# EAGLE board ESP32-P4 Display 5.0 inch V1.0 (EAGLE 9.6.2), part 1 of 3
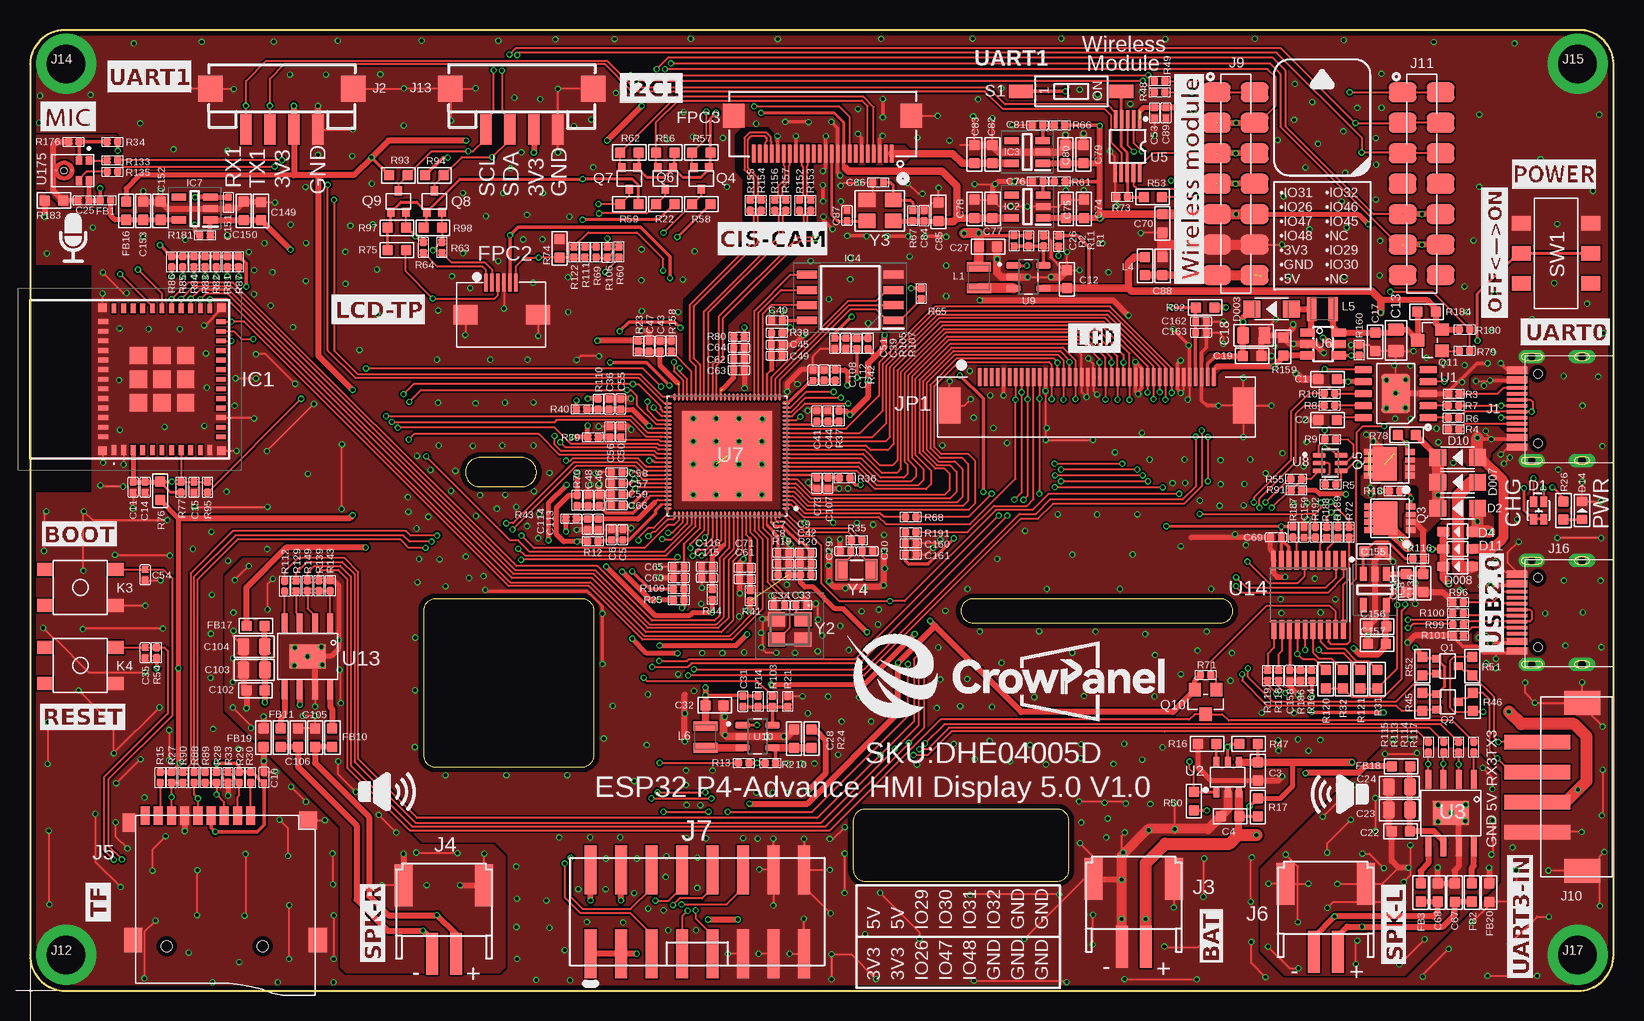
[diagram p0: board, top side]
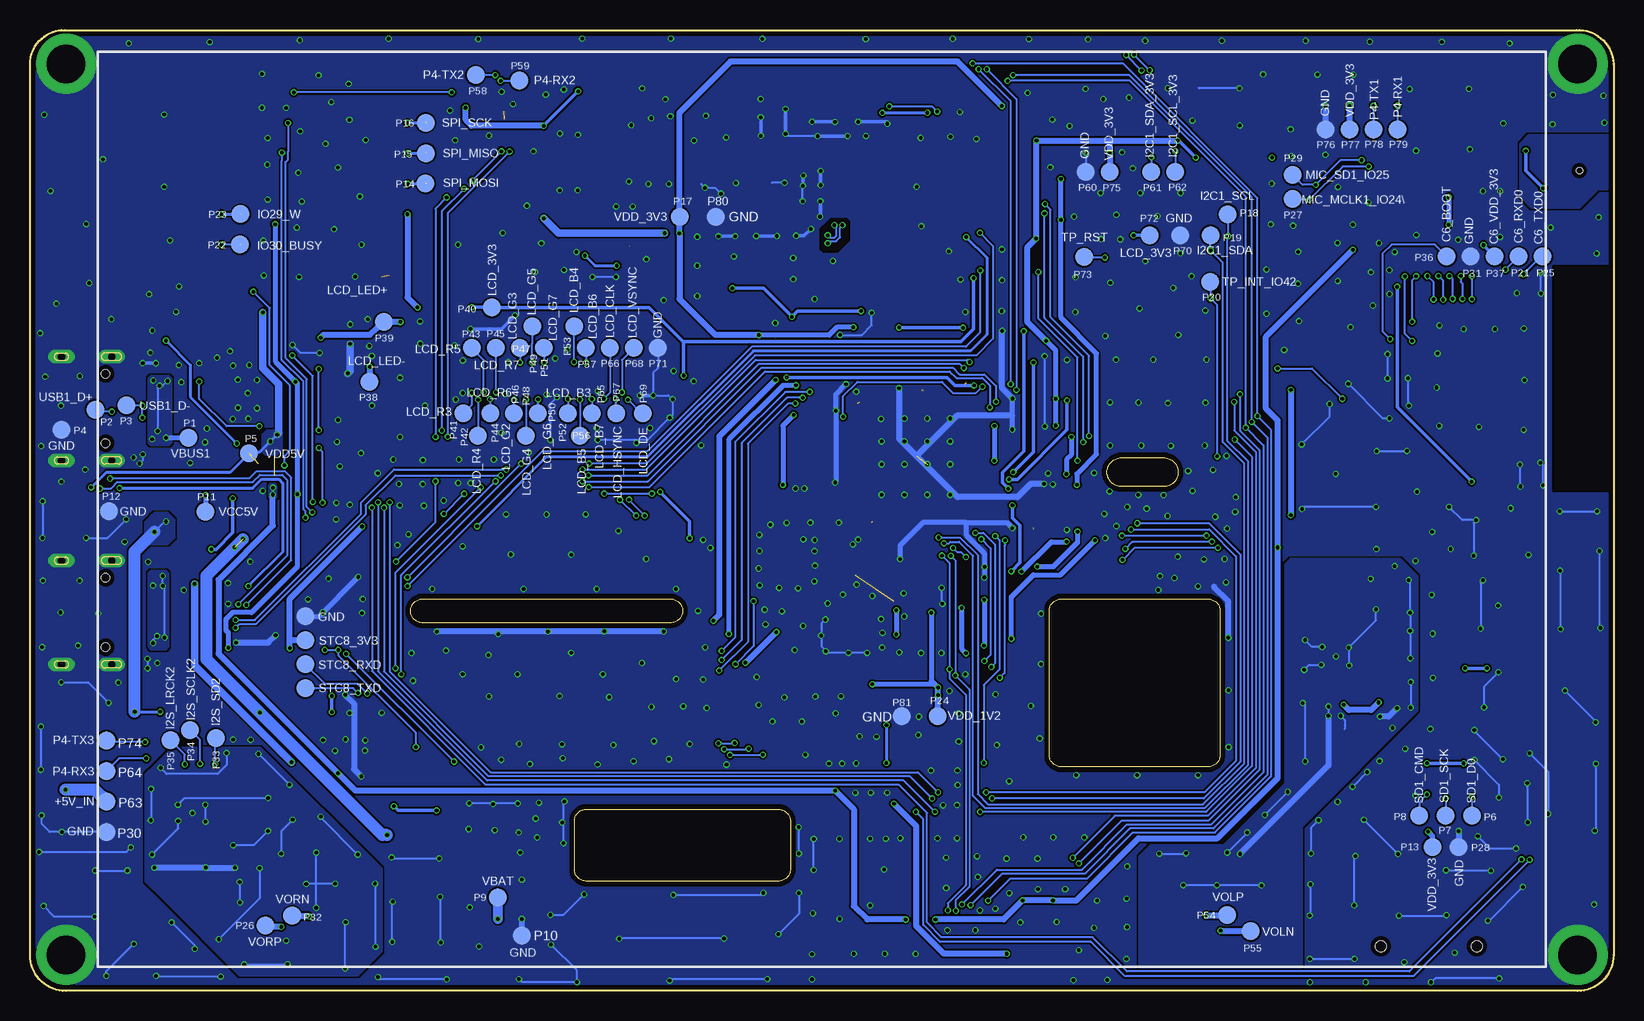
[diagram p1: board, bottom side, seen from below]

Size 132 x 80.12 mm. Coordinates in mm from the lower left corner, seen from the top.
Outline: 129.09,80.12 3.09,80.12 arc90 0,77.3 0,3 arc90 3,0 129,0 arc90 132,3 132,77.3 arc90 129.09,80.12
Outline: 78.61,30.69 99.27,30.69 arc180 99.27,32.69 78.61,32.69 arc180 78.61,30.69
Outline: 32.8,31.68 32.8,19.68 arc90 33.8,18.68 46.03,18.68 arc90 47.03,19.68 47.03,31.68 arc90 46.03,32.68 33.8,32.68 arc90 32.8,31.68
Outline: 69.61,9.14 85.61,9.14 arc90 86.61,10.14 86.61,14.14 arc90 85.61,15.14 69.61,15.14 arc90 68.61,14.14 68.61,10.14 arc90 69.61,9.14
Outline: 37.5,42.05 41.02,42.05 arc180 41.02,44.46 37.5,44.46 arc180 37.5,42.05
Copper layers (1*16): Top 0.035mm / dielectric 1.5mm / Bottom 0.035mm
Design rules "default *": minimum track width 6mil, minimum drill 0.3mm, track to track 6mil, track to pad 6mil, pad to pad 6mil, via to via 6mil, smd to smd 6mil, copper to edge 15mil, drill to drill 6mil, minimum pad ring 10mil, minimum via ring 4mil, stop-mask expansion 4mil, vias tented up to drill 100mil, thermal gap 0mil

## Footprints (pad centres in the part's own frame; a part is rotated, then mirrored left to right if it is on the bottom)
0603 = smd 0.889 x 0.889: 1 -0.762,0; 2 0.762,0
C0402 = smd 0.6 x 0.6: 1 -0.45,0; 2 0.45,0
CROWPANEL_ADVANCE_HMI_C0402 = smd 0.6 x 0.6: 1 -0.45,0; 2 0.45,0
C0805 = smd 1.016 x 1.397: 1 -0.889,0; 2 0.889,0
RC_C0805 = smd 1.016 x 1.397: 1 -0.889,0; 2 0.889,0
COOPER_0603 = smd 0.889 x 0.889: 1 -0.762,0; 2 0.762,0
LED_KT-0603RYG = smd 0.85 x 0.6: 1 0.725,-0.425; 2 0.725,0.425; 3 -0.725,-0.425; 4 -0.725,0.425
D_SOD123FL = smd 1.397 x 1.397: + -1.651,0; - 1.651,0
D_SOD323 = smd 1 x 0.8: + -1.2,0; - 1.2,0
LED0603 = smd 0.762 x 0.889: + -0.762,0; - 0.762,0
L0402 = smd 0.635 x 0.635: 1 -0.445,0; 2 0.445,0
L0603 = smd 0.889 x 0.889: 1 -0.762,0; 2 0.762,0
FPC-6PIN-0.5MM = smd 0.3 x 1.5: 1 -1.31,2.184; 2 -0.81,2.184; 3 -0.31,2.184; 4 0.19,2.184; 5 0.69,2.184; 6 1.19,2.184 | smd 2 x 1.6: 7 -3.01,-0.496; 8 3.036,-0.496
FPC-SMD_P0.50-24P_QCHF-SM-H2.0 = smd 0.3 x 1.5: 1 5.75,-1.574; 2 5.25,-1.574; 3 4.75,-1.574; 4 4.25,-1.574; 5 3.75,-1.574; 6 3.25,-1.574; 7 2.75,-1.574; 8 2.25,-1.574; 9 1.75,-1.574; 10 1.25,-1.574; 11 0.75,-1.574; 12 0.25,-1.574; 13 -0.25,-1.574; 14 -0.75,-1.574; 15 -1.25,-1.574; 16 -1.75,-1.574; 17 -2.25,-1.574; 18 -2.75,-1.574; 19 -3.25,-1.574; 20 -3.75,-1.574; 21 -4.25,-1.574; 22 -4.75,-1.574; 23 -5.25,-1.574; 24 -5.75,-1.574 | smd 1.8 x 2: 25 7.4,1.576; 26 -7.4,1.576
ESP32C6MINI1N4 = smd 0.8 x 0.4: 1 -5.9,4; 2 -5.9,3.2; 3 -5.9,2.4; 4 -5.9,1.6; 5 -5.9,0.8; 6 -5.9,0; 7 -5.9,-0.8; 8 -5.9,-1.6; 9 -5.9,-2.4; 10 -5.9,-3.2; 11 -5.9,-4; 25 5.9,-4; 26 5.9,-3.2; 27 5.9,-2.4; 28 5.9,-1.6; 29 5.9,-0.8; 30 5.9,0; 31 5.9,0.8; 32 5.9,1.6; 33 5.9,2.4; 34 5.9,3.2; 35 5.9,4 | smd 0.4 x 0.8: 12 -4.8,-4.9; 13 -4,-4.9; 14 -3.2,-4.9; 15 -2.4,-4.9; 16 -1.6,-4.9; 17 -0.8,-4.9; 18 0,-4.9; 19 0.8,-4.9; 20 1.6,-4.9; 21 2.4,-4.9; 22 3.2,-4.9; 23 4,-4.9; 24 4.8,-4.9; 36 4.8,4.9; 37 4,4.9; 38 3.2,4.9; 39 2.4,4.9; 40 1.6,4.9; 41 0.8,4.9; 42 0,4.9; 43 -0.8,4.9; 44 -1.6,4.9; 45 -2.4,4.9; 46 -3.2,4.9; 47 -4,4.9; 48 -4.8,4.9 | smd 1.45 x 1.45: 49 0,0; 54 -1.975,1.975; 55 -1.975,0; 56 -1.975,-1.975; 57 0,-1.975; 58 1.975,-1.975; 59 1.975,0; 60 1.975,1.975; 61 0,1.975 | smd 0.7 x 0.7: 50 5.95,4.95; 51 5.95,-4.95; 52 -5.95,-4.95; 53 -5.95,4.95
SOT95P282X145-5N = smd 1.2 x 0.6: 1 -1.3,0.95; 2 -1.3,0; 3 -1.3,-0.95; 4 1.3,-0.95; 5 1.3,0.95
SOIC127P790X216-8N = smd 1.65 x 0.65: 1 -3.6,1.905; 2 -3.6,0.635; 3 -3.6,-0.635; 4 -3.6,-1.905; 5 3.6,-1.905; 6 3.6,-0.635; 7 3.6,0.635; 8 3.6,1.905
USB-3.0TYPEC-SMD = smd 0.3 x 1.7: A1 -3.35,0.5; A4 -2.55,0.5; A5 -1.25,0.5; A6 -0.25,0.5; A7 0.25,0.5; A8 1.25,0.5; A9 2.55,0.5; A12 3.35,0.5; B1 3.05,0.5; B4 2.25,0.5; B5 1.75,0.5; B6 0.75,0.5; B7 -0.75,0.5; B8 -1.75,0.5; B9 -2.25,0.5; B12 -3.05,0.5 | drill 0.6 pad 1.016 long: P$1 -4.325,-0.72; P$2 4.325,-0.72; P$3 -4.325,-4.9; P$4 4.325,-4.9 | hole 0.68: -2.89,-1.22; 2.89,-1.22
CONNECTOR_4P-SMD-2.0 = smd 0.965 x 2.54: 1 -3,0; 2 -1,0; 3 1,0; 4 3,0 | smd 2.032 x 2.184: SS1 -5.946,3.4; SS2 5.946,3.4
PH2.0WT-2PIN = smd 1 x 3.5: P$1 -1,0; P$2 1,0 | smd 1.5 x 3.5: P$3 -3.35,-5.7; P$4 3.35,-5.7
9P-SMD-W/-RING = smd 1.524 x 0.762: 1 0,4.4; 2 0,3.3; 3 0,2.2; 4 0,1.1; 5 0,0; 6 0,-1.1; 7 0,-2.2; 8 0,-3.3; 9 0,-4.4 | smd 1.524 x 1.016: G1 0.6,-5.746 | smd 2.032 x 1.524: G2 10.373,-5.4; G3 10.373,10 | smd 1.524 x 1.524: G4 0.392,9.181 | hole 0.889: 10.9,-2.6; 10.9,5.4
2X8_SMD = smd 4.1 x 1.02: 1 -3.5,8.89; 2 3.5,8.89; 3 -3.5,6.35; 4 3.5,6.35; 5 -3.5,3.81; 6 3.5,3.81; 7 -3.5,1.27; 8 3.5,1.27; 9 -3.5,-1.27; 10 3.5,-1.27; 11 -3.5,-3.81; 12 3.5,-3.81; 13 -3.5,-6.35; 14 3.5,-6.35; 15 -3.5,-8.89; 16 3.5,-8.89
TEST-PIN-4-2.0MM = smd 1.5 x 1.5: 1 -3,0; 2 -1,0; 3 1,0; 4 3,0
H7-2.54-18.28X2.5X5MM = smd 1.65 x 2.3: 1 -7.62,-1.58; 1-1 -7.62,1.58; 2 -5.08,-1.58; 2-2 -5.08,1.58; 3 -2.54,-1.58; 3-3 -2.54,1.58; 4 0,-1.58; 4-4 0,1.58; 5 2.54,-1.58; 5-5 2.54,1.58; 6 5.08,-1.58; 6-6 5.08,1.58; 7 7.62,-1.58; 7-7 7.62,1.58
XH2.54-4P-SMD = smd 1.2 x 5.5: 1 -3.75,-1.875; 2 -1.25,-1.875; 3 1.25,-1.875; 4 3.75,-1.875 | smd 2 x 3: 5 -7,1.875; 6 7,1.875
CROWPANEL_ADVANCE_HMI_THO-M3.2*5MM-HOLE = drill 3.2 pad 5: P$1 0,0
CROWPANEL_ADVICE_HMI-4.3_COOPER_0.5MM*40P = smd 0.3 x 1.5: P$1 -8.81,1.73; P$2 -8.31,1.73; P$3 -7.81,1.73; P$4 -7.31,1.73; P$5 -6.81,1.73; P$6 -6.31,1.73; P$7 -5.81,1.73; P$8 -5.31,1.73; P$9 -4.81,1.73; P$10 -4.31,1.73; P$11 -3.81,1.73; P$12 -3.31,1.73; P$13 -2.81,1.73; P$14 -2.31,1.73; P$15 -1.81,1.73; P$16 -1.31,1.73; P$17 -0.81,1.73; P$18 -0.31,1.73; P$19 0.19,1.73; P$20 0.69,1.73; P$21 1.19,1.73; P$22 1.69,1.73; P$23 2.19,1.73; P$24 2.69,1.73; P$25 3.19,1.73; P$26 3.69,1.73; P$27 4.19,1.73; P$28 4.69,1.73; P$29 5.19,1.73; P$30 5.69,1.73; P$31 6.19,1.73; P$32 6.69,1.73; P$33 7.19,1.73; P$34 7.69,1.73; P$35 8.19,1.73; P$36 8.69,1.73; P$37 9.19,1.73; P$38 9.69,1.73; P$39 10.19,1.73; P$40 10.69,1.73 | smd 1.8 x 3: P$41 -11.31,-0.67; P$42 13.19,-0.67
KEY-4.5X4.5-SMD = smd 1.35 x 1.1: 1 -2.925,1.5; 2 -2.925,-1.5; 3 2.925,-1.5; 4 2.925,1.5
1008(2520) = smd 0.8 x 2: 1 -0.9,0; 2 0.9,0
TEST_PAD-1.5MM = smd 1.5 x 1.5: P$1 0,0
MOS_SOT323 = smd 0.635 x 0.762: 1 -0.635,-0.889; 2 0.635,-0.889; 3 0,0.889
MY_LIB_PDFN3333 = smd 0.5 x 0.8: 1 -0.975,-1.725; 2 -0.325,-1.725; 4 0.975,-1.725; 5 0.975,1.725; 6 0.325,1.725; 7 -0.325,1.725; 8 -0.975,1.725 | smd 0.4 x 0.8: 3 0.325,-1.725 | smd 2.8 x 2: 9 0,0.4
PMOS_SOT23 = smd 1.016 x 1.143: 1 -0.889,-1.016; 2 0.889,-1.016; 3 0,1.016
CROWPANEL_ADVANCE_HMI_R0402 = smd 0.635 x 0.635: 1 -0.445,0; 2 0.445,0
R0402 = smd 0.635 x 0.635: 1 -0.445,0; 2 0.445,0
R0603-SP = smd 0.889 x 0.889: 1 -0.762,0; 2 0.762,0
R0603 = smd 0.889 x 0.889: 1 -0.762,0; 2 0.762,0
COOPER_R0603 = smd 0.889 x 0.889: 1 -0.762,0; 2 0.762,0
SW_SMD2_DSIC-01-TS-GER = smd 1.1 x 2: 1 0,-4.2; 2 0,4.2
SWITCH_6PIN_2P = smd 1.2 x 1.6: 1 2.5,-2.9; 2 0,-2.9; 3 -2.5,-2.9; 4 -2.5,2.9; 5 0,2.9; 6 2.5,2.9
ESOP-10-EP-150MIL = smd 1.5 x 0.6: 1 -2.7,2; 2 -2.7,1; 3 -2.7,0; 4 -2.7,-1; 5 -2.7,-2; 6 2.7,-2; 7 2.7,-1; 8 2.7,0; 9 2.7,1; 10 2.7,2 | smd 2.4 x 3.2: EP 0,0
SOT23-6L = smd 0.5 x 0.9: 1 -0.961,-1.212; 2 -0.011,-1.212; 3 0.94,-1.212; 4 0.94,1.288; 5 -0.011,1.288; 6 -0.961,1.288
NS4168-ESOP-8 = smd 1.6 x 0.5: 1 -2.8,1.905; 2 -2.8,0.635; 3 -2.8,-0.635; 4 -2.8,-1.905; 5 2.8,-1.905; 6 2.8,-0.635; 7 2.8,0.635; 8 2.8,1.905 | smd 2 x 3: 9 0,0
MSOP-10 = smd 1.5 x 0.3: 1 -2.25,1; 2 -2.25,0.5; 3 -2.25,0; 4 -2.25,-0.5; 5 -2.25,-1; 6 2.25,-1.032; 7 2.25,-0.524; 8 2.25,-0.016; 9 2.25,0.492; 10 2.25,1
COOPER_SOT23-6 = smd 0.69 x 1.2: 1 -0.95,-1.3; 2 0,-1.3; 3 0.95,-1.3; 4 0.95,1.3; 5 0,1.3; 6 -0.95,1.3
IC_ESP32-P4NRW32 = smd 0.65 x 0.18: 1 -4.925,4.375; 2 -4.925,4.025; 3 -4.925,3.675; 4 -4.925,3.325; 5 -4.925,2.975; 6 -4.925,2.625; 7 -4.925,2.275; 8 -4.925,1.925; 9 -4.925,1.575; 10 -4.925,1.225; 11 -4.925,0.875; 12 -4.925,0.525; 13 -4.925,0.175; 14 -4.925,-0.175; 15 -4.925,-0.525; 16 -4.925,-0.875; 17 -4.925,-1.225; 18 -4.925,-1.575; 19 -4.925,-1.925; 20 -4.925,-2.275; 21 -4.925,-2.625; 22 -4.925,-2.975; 23 -4.925,-3.325; 24 -4.925,-3.675; 25 -4.925,-4.025; 26 -4.925,-4.375; 53 4.925,-4.375; 54 4.925,-4.025; 55 4.925,-3.675; 56 4.925,-3.325; 57 4.925,-2.975; 58 4.925,-2.625; 59 4.925,-2.275; 60 4.925,-1.925; 61 4.925,-1.575; 62 4.925,-1.225; 63 4.925,-0.875; 64 4.925,-0.525; 65 4.925,-0.175; 66 4.925,0.175; 67 4.925,0.525; 68 4.925,0.875; 69 4.925,1.225; 70 4.925,1.575; 71 4.925,1.925; 72 4.925,2.275; 73 4.925,2.625; 74 4.925,2.975; 75 4.925,3.325; 76 4.925,3.675; 77 4.925,4.025; 78 4.925,4.375 | smd 0.18 x 0.65: 27 -4.375,-4.925; 28 -4.025,-4.925; 29 -3.675,-4.925; 30 -3.325,-4.925; 31 -2.975,-4.925; 32 -2.625,-4.925; 33 -2.275,-4.925; 34 -1.925,-4.925; 35 -1.575,-4.925; 36 -1.225,-4.925; 37 -0.875,-4.925; 38 -0.525,-4.925; 39 -0.175,-4.925; 40 0.175,-4.925; 41 0.525,-4.925; 42 0.875,-4.925; 43 1.225,-4.925; 44 1.575,-4.925; 45 1.925,-4.925; 46 2.275,-4.925; 47 2.625,-4.925; 48 2.975,-4.925; 49 3.325,-4.925; 50 3.675,-4.925; 51 4.025,-4.925; 52 4.375,-4.925; 79 4.375,4.925; 80 4.025,4.925; 81 3.675,4.925; 82 3.325,4.925; 83 2.975,4.925; 84 2.625,4.925; 85 2.275,4.925; 86 1.925,4.925; 87 1.575,4.925; 88 1.225,4.925; 89 0.875,4.925; 90 0.525,4.925; 91 0.175,4.925; 92 -0.175,4.925; 93 -0.525,4.925; 94 -0.875,4.925; 95 -1.225,4.925; 96 -1.575,4.925; 97 -1.925,4.925; 98 -2.275,4.925; 99 -2.625,4.925; 100 -2.975,4.925; 101 -3.325,4.925; 102 -3.675,4.925; 103 -4.025,4.925; 104 -4.375,4.925 | smd 7.5 x 7.5: 105 0,0
SOP65P210X100-6N = smd 1.09 x 0.4: 1 -0.92,0.65; 2 -0.92,0; 3 -0.92,-0.65; 4 0.92,-0.65; 5 0.92,0; 6 0.92,0.65
SOT95P280X145-5N = smd 1.21 x 0.59: 1 -1.255,0.95; 2 -1.255,0; 3 -1.255,-0.95; 4 1.255,-0.95; 5 1.255,0.95
TSSOP20 = smd 1.572 x 0.41: 1 -2.872,2.275; 2 -2.872,1.625; 3 -2.872,0.975; 4 -2.872,0.325; 5 -2.872,-0.325; 6 -2.872,-0.975; 7 -2.872,-1.625; 8 -2.872,-2.275; 9 -2.872,-2.895; 10 -2.872,-3.545; 11 2.872,-3.515; 12 2.872,-2.865; 13 2.872,-2.215; 14 2.872,-1.565; 15 2.872,-0.915; 16 2.872,-0.265; 17 2.872,0.355; 18 2.872,1.005; 19 2.872,1.625; 20 2.872,2.275
MMICT5838-00-012_MIC-SMD_5P-L3.5-W2.7-P1.67 = smd 0.725 x 0.522: 1 -0.838,1.362; 2 -0.838,0.542; 3 0.838,0.542; 4 0.838,1.362 | smd 0.25 x 0.25: 5_1 0,-0.048; 5_2 0,-1.373 | hole 0.5: 0,-0.71
X322540MPB4SI = smd 1.4 x 1.2: 1 -1.1,-0.85; 2 1.1,-0.85; 3 1.1,0.85; 4 -1.1,0.85
24MHZ_1631-24003-BTKEYA = smd 1.4 x 1.2: 1 -1.1,-0.875; 2 1.1,-0.875; 3 1.1,0.875; 4 -1.1,0.875
NORDIC_NRF_XTAL_3215_N = smd 1 x 1.8: 1 -1.25,0; 2 1.25,0

## Placement (x,y rotation side)
C1  1uF  [0603]  108.17,51 0 top
C2  1uF  [0603]  108.17,47.6 0 top
C3  1uF  [0603]  102.36,18.31 90 top
C4  10uF  [0603]  100.03,14.56 0 top
C5  100nF  [C0402]  49.41,38.04 90 top
C6  10uF  [C0402]  48.46,38.04 270 top
C7  100nF  [C0402]  62.8,36.52 0 top
C8  10uF  [C0402]  62.8,35.6 180 top
C9  100nF  [C0402]  64.66,36.52 180 top
C10  1uF  [CROWPANEL_ADVANCE_HMI_C0402]  19.5,17.8 270 top
C11  100nF  [CROWPANEL_ADVANCE_HMI_C0402]  8.6,42 270 top
C12  10uF  [0603]  86.44,59.34 90 top
C13  22uF  [C0805]  113.87,54.25 270 top
C14  10uF  [CROWPANEL_ADVANCE_HMI_C0402]  9.6,42 90 top
C15  100nF  [CROWPANEL_ADVANCE_HMI_C0402]  13.68,42 270 top
C17  1uF  [0603]  112.13,54.13 90 top
C18  22uF  [C0805]  102.01,54.66 0 top
C19  100nF  [0603]  101.88,52.95 0 top
C22  1uF  [0603]  114.27,13.31 180 top
C23  47uF  [RC_C0805]  114.15,15.09 180 top
C24  47uF  [RC_C0805]  114.15,17.01 180 top
C25  100nF  [C0402]  4.46,65.9 0 top
C26  22pF  [CROWPANEL_ADVANCE_HMI_C0402]  82.04,62.54 90 top
C27  10uF  [COOPER_0603]  79.86,62.05 180 top
C28  10uF  [0603]  63.68,21.02 90 top
C29  12pF  [C0402]  67.98,36.66 180 top
C30  12pF  [C0402]  69.81,36.67 0 top
C31  22pF  [CROWPANEL_ADVANCE_HMI_C0402]  59.43,24.14 90 top
C32  10uF  [COOPER_0603]  57.07,23.82 180 top
C33  15pF  [C0402]  64.29,32.16 0 top
C34  15pF  [C0402]  62.45,32.16 0 top
C35  100nF  [CROWPANEL_ADVANCE_HMI_C0402]  9.6,28.19 90 top
C36  100nF  [C0402]  48.29,48.93 90 top
C39  100nF  [C0402]  68.01,53.98 270 top
C40  100nF  [C0402]  62.27,55.9 180 top
C41  100nF  [C0402]  65.59,47.93 90 top
C42  10uF  [C0402]  64.66,35.6 0 top
C43  100nF  [C0402]  52.53,53.77 90 top
C44  10uF  [C0402]  66.51,47.93 270 top
C45  100nF  [C0402]  62.25,53.88 0 top
C46  100nF  [C0402]  47.47,40.9 90 top
C47  10uF  [C0402]  51.62,53.77 270 top
C48  10uF  [C0402]  46.54,40.9 270 top
C49  10uF  [C0402]  62.25,52.96 180 top
C50  100nF  [C0402]  49.26,46.62 90 top
C51  1uF  [C0402]  67.07,53.98 270 top
C53  100nF  [C0402]  93.74,73.2 90 top
C54  100nF  [CROWPANEL_ADVANCE_HMI_C0402]  9.6,34.69 90 top
C55  1uF  [C0402]  49.24,48.93 90 top
C56  10uF  [C0402]  48.32,46.61 270 top
C57  1uF  [C0402]  48.9,42.32 180 top
C58  1uF  [C0402]  48.9,43.25 180 top
C59  1uF  [C0402]  48.9,41.4 180 top
C60  100nF  [C0402]  54.08,34.43 180 top
C61  100nF  [C0402]  59.58,34.34 180 top
C62  10nF  [C0402]  59.1,52.69 0 top
C63  100nF  [C0402]  59.1,51.76 0 top
C64  1uF  [C0402]  59.1,53.62 0 top
C65  1uF  [C0402]  54.08,35.36 180 top
C66  1uF  [C0402]  48.9,40.48 180 top
C67  1nF  [0603]  118.76,8.21 270 top
C68  1nF  [0603]  117.34,8.21 270 top
C69  1uF  [CROWPANEL_ADVANCE_HMI_C0402]  103.86,37.81 0 top
C70  10uF  [0603]  94.41,63.98 270 top
C71  10uF  [C0402]  59.58,35.27 0 top
C73  100nF  [C0402]  65.59,42.34 270 top
C74  10uF  [0603]  87.85,65.2 270 top
C75  100nF  [0603]  86.35,65.21 270 top
C76  100nF  [CROWPANEL_ADVANCE_HMI_C0402]  84,67.48 0 top
C77  100nF  [0603]  80.25,65.21 270 top
C78  10uF  [0603]  78.75,65.21 270 top
C79  10uF  [0603]  87.82,69.76 270 top
C80  100nF  [0603]  86.32,69.76 270 top
C81  100nF  [CROWPANEL_ADVANCE_HMI_C0402]  83.98,72.17 0 top
C82  100nF  [0603]  80.22,69.76 270 top
C83  10uF  [0603]  78.72,69.76 270 top
C84  100nF  [CROWPANEL_ADVANCE_HMI_C0402]  74.53,64.64 270 top
C85  1nF  [COOPER_0603]  75.73,64.94 270 top
C86  1uF  [CROWPANEL_ADVANCE_HMI_C0402]  70.7,67.4 0 top
C87  15pF  [C0402]  68.11,64.65 90 top
C88  10uF  [0603]  94.41,60.44 90 top
C89  1uF  [C0402]  94.68,73.2 90 top
C102  1uF  [0603]  18.81,25.07 180 top
C103  47uF  [RC_C0805]  18.69,26.76 180 top
C104  47uF  [RC_C0805]  18.69,28.71 180 top
C105  1nF  [0603]  23.77,21.12 270 top
C106  1nF  [0603]  22.34,21.12 270 top
C107  10uF  [C0402]  66.51,42.34 90 top
C108  100nF  [C0402]  65.27,51.34 90 top
C112  10uF  [C0402]  66.2,51.35 270 top
C113  100nF  [C0402]  47.38,38.9 270 top
C114  10uF  [C0402]  46.46,38.9 90 top
C115  100nF  [C0402]  56.44,34.44 180 top
C116  10uF  [C0402]  56.43,35.37 0 top
C136  10uF  [0603]  116.15,34.01 90 top
C144  100nF  [0603]  114.71,34.01 90 top
C149  10uF  [COOPER_0603]  19.25,65.02 270 top
C150  100nF  [COOPER_0603]  17.82,65.02 270 top
C151  100nF  [CROWPANEL_ADVANCE_HMI_C0402]  16.54,65.73 90 top
C152  100nF  [COOPER_0603]  10.88,65.05 270 top
C153  10uF  [COOPER_0603]  9.44,65.05 270 top
C155  100nF  [0603]  112,36.65 180 top
C156  100nF  [0603]  112.29,30.37 0 top
C157  10uF  [0603]  112.28,28.93 0 top
C158  100nF  [CROWPANEL_ADVANCE_HMI_C0402]  105,26.3 90 top
C159  100nF  [CROWPANEL_ADVANCE_HMI_C0402]  106.21,38.26 270 top
C160  10uF  [CROWPANEL_ADVANCE_HMI_C0402]  73.42,37.31 180 top
C161  100nF  [CROWPANEL_ADVANCE_HMI_C0402]  73.42,36.38 180 top
C162  10uF  [CROWPANEL_ADVANCE_HMI_C0402]  97.61,55.82 180 top
C163  100nF  [CROWPANEL_ADVANCE_HMI_C0402]  97.61,54.88 180 top
D1  KT-0603RYG  [LED_KT-0603RYG]  125.75,40.05 270 top
D2  DSS34  [D_SOD123FL]  119.01,40.23 180 top
D003  DSS34  [D_SOD123FL]  103.5,56.86 180 top
D4  1N5819WS  [D_SOD323]  119.01,38.28 180 top
D007  DSS34  [D_SOD123FL]  119.01,42.41 180 top
D008  1N5819WS  [D_SOD323]  119.01,35.38 180 top
D10  DSS34  [D_SOD123FL]  119.01,44.46 180 top
D11  1N5819WS 35.384346875  [D_SOD323]  119.01,36.83 180 top
D14  Red  [LED0603]  129.38,40.05 90 top
FB1  0R/800mA  [L0402]  6.29,65.9 180 top
FB2  1K/磁珠_NC  [L0603]  120.2,8.21 270 top
FB3  1K/磁珠_NC  [L0603]  115.92,8.21 270 top
FB10  1K/磁珠_NC  [L0603]  25.21,21.12 270 top
FB11  1K/磁珠_NC  [L0603]  20.9,21.12 270 top
FB16  0R/800mA_NC  [L0603]  8.01,65.05 270 top
FB17  0R/800mA  [L0603]  18.82,30.43 180 top
FB18  0R/800mA  [L0603]  114.28,18.71 180 top
FB19  0R/800mA  [L0603]  19.46,21.12 90 top
FB20  0R/800mA  [L0603]  121.63,8.21 90 top
FPC2  FPC-6PIN-0.5MM  [FPC-6PIN-0.5MM]  39.32,56.85 0 top
FPC3  AFC24-S24FIA-00  [FPC-SMD_P0.50-24P_QCHF-SM-H2.0]  66.07,71.38 0 top
IC1  ESP32-C6-MINI-1-N4  [ESP32C6MINI1N4]  11,51 90 top
IC2  ME6211C18M5G-N  [SOT95P282X145-5N]  83.15,65.39 180 top
IC3  ME6211C28M5G-N  [SOT95P282X145-5N]  83.12,69.95 180 top
IC4  W25Q128JVSIQ  [SOIC127P790X216-8N]  68.38,57.81 180 top
IC7  ME6211C33M5G-N  [SOT95P282X145-5N]  13.73,65.23 180 top
IC8  ME6211C33M5G-N  [SOT95P282X145-5N]  112.1,33.46 270 top
J1  TYPEC-3.0-16P-SMD  [USB-3.0TYPEC-SMD]  124.47,48.55 90 top
J2  HY2.0-4P-SMT  [CONNECTOR_4P-SMD-2.0]  21,71.82 0 top
J3  PH2.0WT-2PIN  [PH2.0WT-2PIN]  92,3.66 180 top
J4  PH2.0WT-2PIN  [PH2.0WT-2PIN]  34.5,3.11 180 top
J5  [9P-SMD-W/-RING]  14,14.62 270 top
J6  PH2.0WT-2PIN  [PH2.0WT-2PIN]  108,3.24 180 top
J7  CONN_8X2_SMD  [2X8_SMD]  55.63,6.6 90 top
J8  HC-PZ200-8.7L-1X4PZ1  [TEST-PIN-4-2.0MM]  109.05,28.23 90 bottom
J9  [H7-2.54-18.28X2.5X5MM]  100.5,67.3 270 top
J10  XH2.54-4P-SMT  [XH2.54-4P-SMD]  127.5,17 270 top
J11  [H7-2.54-18.28X2.5X5MM]  116,67.3 270 top
J12  [CROWPANEL_ADVANCE_HMI_THO-M3.2*5MM-HOLE]  3,3 0 top
J13  HY2.0-4P-SMT  [CONNECTOR_4P-SMD-2.0]  41,71.82 0 top
J14  [CROWPANEL_ADVANCE_HMI_THO-M3.2*5MM-HOLE]  3,77.3 0 top
J15  [CROWPANEL_ADVANCE_HMI_THO-M3.2*5MM-HOLE]  129,77.3 0 top
J16  TYPEC-3.0-16P-SMD  [USB-3.0TYPEC-SMD]  124.47,31.55 90 top
J17  [CROWPANEL_ADVANCE_HMI_THO-M3.2*5MM-HOLE]  129,3 0 top
JP1  CROWPANEL_ADVICE_HMI-4.3_COOPER_0.5MM-40PIN40PIN  [CROWPANEL_ADVICE_HMI-4.3_COOPER_0.5MM*40P]  87.97,49.45 0 top
K3  KEY-4.5X4.5  [KEY-4.5X4.5-SMD]  4.21,33.64 180 top
K4  KEY-4.5X4.5  [KEY-4.5X4.5-SMD]  4.21,27.14 180 top
L1  2.2μH_C5179446  [1008(2520)]  79.1,59.46 90 top
L4  0R  [L0603]  92.96,60.44 90 top
L5  4.7uH_C45385206_2.4A  [1008(2520)]  107.73,56.86 180 top
L6  2.2μH_C5179446  [1008(2520)]  56.29,21.17 90 top
P1  TEST_PADPAD-1.5MM  [TEST_PAD-1.5MM]  118.79,46.13 0 bottom
P2  TEST_PADPAD-1.5MM  [TEST_PAD-1.5MM]  126.56,48.46 180 bottom
P3  TEST_PADPAD-1.5MM  [TEST_PAD-1.5MM]  123.95,48.82 180 bottom
P4  TEST_PADPAD-1.5MM  [TEST_PAD-1.5MM]  129.39,46.8 0 bottom
P5  TEST_PADPAD-1.5MM  [TEST_PAD-1.5MM]  113.74,44.81 0 bottom
P6  TEST_PADPAD-1.5MM  [TEST_PAD-1.5MM]  11.8,14.6 0 bottom
P7  TEST_PADPAD-1.5MM  [TEST_PAD-1.5MM]  14,14.6 0 bottom
P8  TEST_PADPAD-1.5MM  [TEST_PAD-1.5MM]  16.2,14.6 0 bottom
P9  TEST_PADPAD-1.5MM  [TEST_PAD-1.5MM]  93,7.8 0 bottom
P10  TEST_PADPAD-1.5MM  [TEST_PAD-1.5MM]  91,4.6 0 bottom
P11  TEST_PADPAD-1.5MM  [TEST_PAD-1.5MM]  117.38,39.96 0 bottom
P12  TEST_PADPAD-1.5MM  [TEST_PAD-1.5MM]  125.4,40 0 bottom
P13  TEST_PADPAD-1.5MM  [TEST_PAD-1.5MM]  15.1,12 0 bottom
P14  TEST_PADPAD-1.5MM  [TEST_PAD-1.5MM]  99.03,67.32 0 bottom
P15  TEST_PADPAD-1.5MM  [TEST_PAD-1.5MM]  99,69.84 0 bottom
P16  TEST_PADPAD-1.5MM  [TEST_PAD-1.5MM]  99,72.37 0 bottom
P17  TEST_PADPAD-1.5MM  [TEST_PAD-1.5MM]  77.84,64.55 0 bottom
P18  TEST_PADPAD-1.5MM  [TEST_PAD-1.5MM]  32.16,64.76 0 bottom
P19  TEST_PADPAD-1.5MM  [TEST_PAD-1.5MM]  33.58,63 180 bottom
P20  TEST_PADPAD-1.5MM  [TEST_PAD-1.5MM]  33.61,59.11 270 bottom
P21  TEST_PADPAD-1.5MM  [TEST_PAD-1.5MM]  7.9,61.23 90 bottom
P22  TEST_PADPAD-1.5MM  [TEST_PAD-1.5MM]  114.5,62.23 0 bottom
P23  TEST_PADPAD-1.5MM  [TEST_PAD-1.5MM]  114.44,64.77 0 bottom
P24  TEST_PADPAD-1.5MM  [TEST_PAD-1.5MM]  56.35,22.89 0 bottom
P25  TEST_PADPAD-1.5MM  [TEST_PAD-1.5MM]  5.9,61.23 90 bottom
P26  TEST_PADPAD-1.5MM  [TEST_PAD-1.5MM]  112.37,5.45 270 bottom
P27  TEST_PADPAD-1.5MM  [TEST_PAD-1.5MM]  26.74,66.02 180 bottom
P28  TEST_PADPAD-1.5MM  [TEST_PAD-1.5MM]  12.9,12 0 bottom
P29  TEST_PADPAD-1.5MM  [TEST_PAD-1.5MM]  26.74,68.02 180 bottom
P30  TEST_PADPAD-1.5MM  [TEST_PAD-1.5MM]  125.62,13.25 180 bottom
P31  TEST_PADPAD-1.5MM  [TEST_PAD-1.5MM]  11.9,61.23 90 bottom
P32  TEST_PADPAD-1.5MM  [TEST_PAD-1.5MM]  110.15,6.28 270 bottom
P33  TEST_PADPAD-1.5MM  [TEST_PAD-1.5MM]  116.51,21.09 90 bottom
P34  TEST_PADPAD-1.5MM  [TEST_PAD-1.5MM]  118.65,21.76 90 bottom
P35  TEST_PADPAD-1.5MM  [TEST_PAD-1.5MM]  120.29,20.9 90 bottom
P36  TEST_PADPAD-1.5MM  [TEST_PAD-1.5MM]  13.9,61.23 270 bottom
P37  TEST_PADPAD-1.5MM  [TEST_PAD-1.5MM]  9.9,61.23 90 bottom
P38  TEST_PADPAD-1.5MM  [TEST_PAD-1.5MM]  103.7,50.8 270 bottom
P39  TEST_PADPAD-1.5MM  [TEST_PAD-1.5MM]  102.51,55.77 270 bottom
P40  TEST_PADPAD-1.5MM  [TEST_PAD-1.5MM]  93.5,56.99 180 bottom
P41  TEST_PADPAD-1.5MM  [TEST_PAD-1.5MM]  95.88,48.15 270 bottom
P42  TEST_PADPAD-1.5MM  [TEST_PAD-1.5MM]  94.68,46.3 270 bottom
P43  TEST_PADPAD-1.5MM  [TEST_PAD-1.5MM]  95.17,53.6 270 bottom
P44  TEST_PADPAD-1.5MM  [TEST_PAD-1.5MM]  93.64,48.15 270 bottom
P45  TEST_PADPAD-1.5MM  [TEST_PAD-1.5MM]  93.17,53.6 270 bottom
P46  TEST_PADPAD-1.5MM  [TEST_PAD-1.5MM]  91.66,48.15 270 bottom
P47  TEST_PADPAD-1.5MM  [TEST_PAD-1.5MM]  91.15,53.6 270 bottom
P48  TEST_PADPAD-1.5MM  [TEST_PAD-1.5MM]  90.68,46.3 180 bottom
P49  TEST_PADPAD-1.5MM  [TEST_PAD-1.5MM]  90.12,55.4 270 bottom
P50  TEST_PADPAD-1.5MM  [TEST_PAD-1.5MM]  89.66,48.15 270 bottom
P51  TEST_PADPAD-1.5MM  [TEST_PAD-1.5MM]  89.15,53.6 270 bottom
P52  TEST_PADPAD-1.5MM  [TEST_PAD-1.5MM]  87.16,48.15 270 bottom
P53  TEST_PADPAD-1.5MM  [TEST_PAD-1.5MM]  86.64,55.4 270 bottom
P54  TEST_PADPAD-1.5MM  [TEST_PAD-1.5MM]  32.2,6.34 0 bottom
P55  TEST_PADPAD-1.5MM  [TEST_PAD-1.5MM]  30.24,4.98 0 bottom
P56  TEST_PADPAD-1.5MM  [TEST_PAD-1.5MM]  86.17,46.3 270 bottom
P57  TEST_PADPAD-1.5MM  [TEST_PAD-1.5MM]  85.66,53.6 270 bottom
P58  TEST_PADPAD-1.5MM  [TEST_PAD-1.5MM]  94.85,76.36 0 bottom
P59  TEST_PADPAD-1.5MM  [TEST_PAD-1.5MM]  91.21,75.91 0 bottom
P60  TEST_PADPAD-1.5MM  [TEST_PAD-1.5MM]  44,68.3 0 bottom
P61  TEST_PADPAD-1.5MM  [TEST_PAD-1.5MM]  38.54,68.3 0 bottom
P62  TEST_PADPAD-1.5MM  [TEST_PAD-1.5MM]  36.54,68.3 0 bottom
P63  TEST_PADPAD-1.5MM  [TEST_PAD-1.5MM]  125.62,15.79 180 bottom
P64  TEST_PADPAD-1.5MM  [TEST_PAD-1.5MM]  125.62,18.33 180 bottom
P65  TEST_PADPAD-1.5MM  [TEST_PAD-1.5MM]  85.17,48.15 270 bottom
P66  TEST_PADPAD-1.5MM  [TEST_PAD-1.5MM]  83.66,53.6 270 bottom
P67  TEST_PADPAD-1.5MM  [TEST_PAD-1.5MM]  83.14,48.15 0 bottom
P68  TEST_PADPAD-1.5MM  [TEST_PAD-1.5MM]  81.66,53.6 0 bottom
P69  TEST_PADPAD-1.5MM  [TEST_PAD-1.5MM]  80.92,48.15 0 bottom
P70  TEST_PADPAD-1.5MM  [TEST_PAD-1.5MM]  36.12,63 270 bottom
P71  TEST_PADPAD-1.5MM  [TEST_PAD-1.5MM]  79.66,53.6 270 bottom
P72  TEST_PADPAD-1.5MM  [TEST_PAD-1.5MM]  38.66,63 270 bottom
P73  TEST_PADPAD-1.5MM  [TEST_PAD-1.5MM]  44.14,61.2 270 bottom
P74  TEST_PADPAD-1.5MM  [TEST_PAD-1.5MM]  125.62,20.87 180 bottom
P75  TEST_PADPAD-1.5MM  [TEST_PAD-1.5MM]  42,68.3 0 bottom
P76  TEST_PADPAD-1.5MM  [TEST_PAD-1.5MM]  24,71.82 270 bottom
P77  TEST_PADPAD-1.5MM  [TEST_PAD-1.5MM]  22,71.82 270 bottom
P78  TEST_PADPAD-1.5MM  [TEST_PAD-1.5MM]  20,71.82 270 bottom
P79  TEST_PADPAD-1.5MM  [TEST_PAD-1.5MM]  18,71.82 270 bottom
P80  TEST_PADPAD-1.5MM  [TEST_PAD-1.5MM]  74.84,64.55 0 bottom
P81  TEST_PADPAD-1.5MM  [TEST_PAD-1.5MM]  59.35,22.89 0 bottom
Q1  BSS138W_SOT323  [MOS_SOT323]  118.16,27.08 270 top
Q2  BSS138W_SOT323  [MOS_SOT323]  118.18,24.1 270 top
Q3  NCE20P45Q  [MY_LIB_PDFN3333]  113.36,39.4 90 top
Q4  BSS138W_SOT323  [MOS_SOT323]  55.96,67.75 180 top
Q5  NCE20P45Q  [MY_LIB_PDFN3333]  113.33,43.94 90 top
Q6  BSS138W_SOT323  [MOS_SOT323]  52.96,67.75 180 top
Q7  BSS138W_SOT323  [MOS_SOT323]  49.96,67.75 180 top
Q8  BSS138W_SOT323  [MOS_SOT323]  33.72,65.82 0 top
Q9  BSS138W_SOT323  [MOS_SOT323]  30.71,65.82 0 top
Q10  AO3401  [PMOS_SOT23]  98,24.09 180 top
Q11  AO3401_NC  [PMOS_SOT23]  116.69,54.25 90 top
R1  10K  [CROWPANEL_ADVANCE_HMI_R0402]  85.75,62.51 90 top
R2  100K  [CROWPANEL_ADVANCE_HMI_R0402]  83.25,62.54 270 top
R3  5.1K  [CROWPANEL_ADVANCE_HMI_R0402]  118.69,49.79 0 top
R4  5.1K  [CROWPANEL_ADVANCE_HMI_R0402]  118.67,46.82 180 top
R5  10K  [CROWPANEL_ADVANCE_HMI_R0402]  108.41,42.22 0 top
R6  0R  [CROWPANEL_ADVANCE_HMI_R0402]  118.67,47.79 0 top
R7  0R  [CROWPANEL_ADVANCE_HMI_R0402]  118.66,48.8 0 top
R8  0R  [CROWPANEL_ADVANCE_HMI_R0402]  108.32,48.8 0 top
R9  10K  [CROWPANEL_ADVANCE_HMI_R0402]  108.38,46 180 top
R10  0R  [CROWPANEL_ADVANCE_HMI_R0402]  108.33,49.8 0 top
R11  22.1K  [CROWPANEL_ADVANCE_HMI_R0402]  84.49,62.54 90 top
R12  0R  [R0402]  46.91,37.5 180 top
R13  0R  [CROWPANEL_ADVANCE_HMI_R0402]  59.5,19.01 180 top
R14  NC/499K  [CROWPANEL_ADVANCE_HMI_R0402]  60.68,24.14 270 top
R15  10K  [CROWPANEL_ADVANCE_HMI_R0402]  10.85,17.8 90 top
R16  2K  [R0603-SP]  98.12,20.6 0 top
R17  5.1K  [R0603]  102.36,15.31 90 top
R18  10K  [CROWPANEL_ADVANCE_HMI_R0402]  113.74,41.68 0 top
R19  0R  [R0402]  62.8,34.68 0 top
R20  0R  [R0402]  64.66,34.68 180 top
R21  NC/499K  [CROWPANEL_ADVANCE_HMI_R0402]  63.15,24.14 90 top
R22  4.7K  [R0603]  52.96,65.6 180 top
R23  0R  [R0402]  50.7,53.77 90 top
R24  0R  [R0603]  65.14,21.02 90 top
R25  0R  [R0402]  54.08,32.57 180 top
R26  5.1K  [R0603]  127.83,40.05 90 top
R27  10K  [CROWPANEL_ADVANCE_HMI_R0402]  11.8,17.8 90 top
R28  10K  [CROWPANEL_ADVANCE_HMI_R0402]  15.55,17.8 90 top
R29  10K  [CROWPANEL_ADVANCE_HMI_R0402]  17.45,17.8 90 top
R30  10K  [CROWPANEL_ADVANCE_HMI_R0402]  18.39,17.8 90 top
R31  27K  [R0603-SP]  112.33,26 90 top
R32  2K  [R0603-SP]  109.45,26 90 top
R33  NC  [CROWPANEL_ADVANCE_HMI_R0402]  16.5,17.8 270 top
R34  NC  [R0402]  6.87,70.8 0 top
R35  NC/10M  [R0402]  68.91,37.58 180 top
R36  0R  [R0402]  67.91,42.76 0 top
R37  0R  [R0402]  67.44,47.93 90 top
R38  0R  [R0402]  62.25,54.85 0 top
R39  0R  [R0402]  46.93,46.17 180 top
R40  0R  [R0402]  45.99,48.49 180 top
R41  0R  [R0402]  60.03,32.96 270 top
R42  0R  [R0402]  67.13,51.34 90 top
R43  0R  [R0402]  45.11,39.37 180 top
R44  0R  [R0402]  56.88,33.06 270 top
R45  4.7K  [R0603]  116.07,24.1 270 top
R46  4.7K  [R0603]  120.27,24.1 90 top
R47  5.1K  [R0603]  101.59,20.6 0 top
R48  0R  [CROWPANEL_ADVANCE_HMI_R0402]  94.16,74.92 180 top
R49  0R  [CROWPANEL_ADVANCE_HMI_R0402]  94.17,75.87 180 top
R50  5.1K  [R0603]  97.01,15.82 270 top
R51  4.7K  [R0603]  120.24,27.08 270 top
R52  4.7K  [R0603]  116.06,27.08 270 top
R53  2K  [COOPER_R0603]  93.6,66.2 180 top
R54  10K  [CROWPANEL_ADVANCE_HMI_R0402]  10.55,28.2 90 top
R55  0R  [CROWPANEL_ADVANCE_HMI_R0402]  105.55,42.68 180 top
R56  4.7K  [R0603]  52.96,69.9 180 top
R57  4.7K  [R0603]  55.96,69.9 180 top
R58  4.7K  [R0603]  55.96,65.6 180 top
R59  4.7K  [R0603]  49.96,65.6 180 top
R60  0R  [CROWPANEL_ADVANCE_HMI_R0402]  49.09,61.6 270 top
R61  10K  [CROWPANEL_ADVANCE_HMI_R0402]  85.84,67.48 0 top
R62  4.7K  [R0603]  49.96,69.9 180 top
R63  0R  [R0402]  34.34,61.98 90 top
R64  0R  [R0402]  32.79,61.98 90 top
R65  10K  [R0402]  74.3,58.14 90 top
R66  10K  [CROWPANEL_ADVANCE_HMI_R0402]  85.82,72.17 0 top
R67  10K  [CROWPANEL_ADVANCE_HMI_R0402]  73.59,64.64 270 top
R68  22R  [R0402]  73.42,39.52 0 top
R69  0R  [CROWPANEL_ADVANCE_HMI_R0402]  47.19,61.6 270 top
R70  0R  [R0402]  45.6,40.9 90 top
R71  10K  [CROWPANEL_ADVANCE_HMI_R0402]  98,26.33 180 top
R72  0R  [CROWPANEL_ADVANCE_HMI_R0402]  109.96,38.24 90 top
R73  10K  [CROWPANEL_ADVANCE_HMI_R0402]  91.03,66.2 0 top
R74  27K  [R0603-SP]  44.14,61.91 90 top
R75  NC  [R0603]  30.59,61.77 0 top
R76  0R  [R0603]  10.85,41.69 270 top
R77  10K  [CROWPANEL_ADVANCE_HMI_R0402]  12.59,42 270 top
R78  4.7K  [R0603]  114.77,46.36 0 top
R79  NC  [CROWPANEL_ADVANCE_HMI_R0402]  119.58,53.37 180 top
R80  0R  [R0402]  59.1,54.54 0 top
R81  51K  [CROWPANEL_ADVANCE_HMI_R0402]  16.45,60.79 270 top
R82  51K  [CROWPANEL_ADVANCE_HMI_R0402]  15.52,60.79 270 top
R83  51K  [CROWPANEL_ADVANCE_HMI_R0402]  14.6,60.79 270 top
R84  51K  [CROWPANEL_ADVANCE_HMI_R0402]  13.66,60.79 270 top
R85  51K  [CROWPANEL_ADVANCE_HMI_R0402]  12.73,60.79 270 top
R86  51K  [CROWPANEL_ADVANCE_HMI_R0402]  11.81,60.79 270 top
R87  10K  [CROWPANEL_ADVANCE_HMI_R0402]  17.39,60.79 270 top
R88  0R  [CROWPANEL_ADVANCE_HMI_R0402]  13.68,17.8 90 top
R89  0R  [CROWPANEL_ADVANCE_HMI_R0402]  14.61,17.8 90 top
R90  0R  [CROWPANEL_ADVANCE_HMI_R0402]  12.74,17.8 90 top
R91  10K  [CROWPANEL_ADVANCE_HMI_R0402]  105.56,41.74 180 top
R92  0R  [R0603]  97.96,56.99 0 top
R93  4.7K  [R0603]  30.71,68 0 top
R94  4.7K  [R0603]  33.72,68 0 top
R95  0R  [R0402]  14.79,42 90 top
R96  5.1K  [CROWPANEL_ADVANCE_HMI_R0402]  119.04,32.41 0 top
R97  4.7K  [R0603]  30.59,63.62 0 top
R98  4.7K  [R0603]  33.58,63.62 0 top
R99  22R  [R0402]  119.05,30.56 180 top
R100  22R  [R0402]  119.04,31.48 180 top
R101  5.1K  [CROWPANEL_ADVANCE_HMI_R0402]  119.06,29.63 180 top
R103  0R  [CROWPANEL_ADVANCE_HMI_R0402]  61.89,24.14 90 top
R105  0R  [R0402]  68.93,53.97 270 top
R106  10K  [CROWPANEL_ADVANCE_HMI_R0402]  48.13,61.59 270 top
R107  0R_NC  [R0402]  69.85,53.99 270 top
R109  NC  [R0402]  54.08,33.5 180 top
R110  NC  [R0402]  47.36,48.93 90 top
R111  0R  [R0402]  46.25,61.59 90 top
R112  0R  [CROWPANEL_ADVANCE_HMI_R0402]  21.23,33.75 270 top
R113  0R  [CROWPANEL_ADVANCE_HMI_R0402]  117.85,20.32 270 top
R114  0R  [CROWPANEL_ADVANCE_HMI_R0402]  119.08,20.32 270 top
R115  0R  [CROWPANEL_ADVANCE_HMI_R0402]  116.57,20.32 270 top
R116  10K  [CROWPANEL_ADVANCE_HMI_R0402]  115.72,36.02 0 top
R117  100K  [CROWPANEL_ADVANCE_HMI_R0402]  120.35,20.32 270 top
R118  0R  [CROWPANEL_ADVANCE_HMI_R0402]  104.08,26.3 90 top
R119  0R  [CROWPANEL_ADVANCE_HMI_R0402]  103.17,26.3 90 top
R120  5.1K_NC  [R0603]  108,26 90 top
R121  5.1K_NC  [R0603]  110.9,26 90 top
R122  NC  [R0402]  45.33,61.59 90 top
R129  0R  [CROWPANEL_ADVANCE_HMI_R0402]  22.18,33.77 270 top
R133  0R  [R0402]  6.87,69.24 180 top
R135  0R  [R0402]  6.87,68.3 0 top
R139  100K  [CROWPANEL_ADVANCE_HMI_R0402]  24.08,33.79 270 top
R143  47K  [CROWPANEL_ADVANCE_HMI_R0402]  25.03,33.79 90 top
R149  0R  [CROWPANEL_ADVANCE_HMI_R0402]  23.13,33.79 270 top
R152  100R  [R0402]  64.15,65.5 90 top
R153  100R  [R0402]  65.09,65.5 90 top
R154  100R  [R0402]  60.95,65.5 90 top
R155  100R  [R0402]  60.03,65.5 90 top
R156  100R  [R0402]  62.08,65.5 90 top
R157  100R  [R0402]  63,65.5 90 top
R158  4.02K  [R0402]  53.46,53.77 90 top
R159  3.6R  [R0603-SP]  104.47,53.71 270 top
R160  10K  [CROWPANEL_ADVANCE_HMI_R0402]  110.8,53.43 90 top
R164  39k  [CROWPANEL_ADVANCE_HMI_R0402]  106.84,26.3 90 top
R176  NC  [R0402]  3.64,70.8 180 top
R180  NC  [CROWPANEL_ADVANCE_HMI_R0402]  119.58,55.14 180 top
R181  10K  [CROWPANEL_ADVANCE_HMI_R0402]  14.59,63 0 top
R183  0R  [R0603-SP]  2,65.9 0 top
R184  0R  [R0603]  116.42,56.62 180 top
R186  100k  [CROWPANEL_ADVANCE_HMI_R0402]  105.92,26.3 270 top
R187  10k  [CROWPANEL_ADVANCE_HMI_R0402]  105.28,38.25 270 top
R188  22R  [R0402]  108.09,38.23 90 top
R189  22R  [R0402]  109.03,38.23 90 top
R191  10K  [R0402]  73.42,38.25 180 top
R192  0R  [CROWPANEL_ADVANCE_HMI_R0402]  107.15,38.24 270 top
R210  NC/10K  [CROWPANEL_ADVANCE_HMI_R0402]  61.72,19 180 top
S1  DSIC-01-TS-GER  [SW_SMD2_DSIC-01-TS-GER]  86.79,75 270 top
SW1  switch_6pin  [SWITCH_6PIN_2P]  127.2,61.5 90 top
U1  CH340K  [ESOP-10-EP-150MIL]  113.85,49.8 180 top
U2  TP4059-SOT23-6  [SOT23-6L]  99.84,17.79 0 top
U3  NS4168  [NS4168-ESOP-8]  118.46,14.83 270 top
U5  SGM3005XMSTR  [MSOP-10]  91.49,70.42 270 top
U6  MT9201  [COOPER_SOT23-6]  107.79,53.94 270 top
U7  ESP32-P4NRW32  [IC_ESP32-P4NRW32]  58.11,44.6 180 top
U8  UMH3NTN  [SOP65P210X100-6N]  108.37,44.01 0 top
U9  MT3406_C22462728  [SOT95P280X145-5N]  83.24,59.53 0 top
U10  MT3406_C22462728  [SOT95P280X145-5N]  60.64,21.22 0 top
U13  NS4168  [NS4168-ESOP-8]  23.13,27.89 270 top
U14  STC8H1K17-36I  [TSSOP20]  107.21,33.02 270 top
U175  MMICT5838-00-012_LMD3526B261-OFA03  [MMICT5838-00-012_MIC-SMD_5P-L3.5-W2.7-P1.67]  3.55,68.4 270 top
U$113  [P4-LCD-7.0-BK3]  0,0 0 top
Y2  40MHZ  [X322540MPB4SI]  63.34,30.15 180 top
Y3  24Mhz  [24MHZ_1631-24003-BTKEYA]  70.86,65.06 180 top
Y4  32.768K  [NORDIC_NRF_XTAL_3215_N]  68.91,35.11 0 top

## Library data of the parts
C1-C4 C12 C13 C17-C19 C22 C28 C67 C68 C70 C74 C75 C77-C80 C82 C83 C88 C102 C105 C106 C136 C144 C155-C157 R17 R22 R24 R26 R45-R47 R50-R52 R56-R59 R62 R75 R76 R78 R92-R94 R97 R98 R120 R121 R184 = RC
C5-C9 C25 C29 C30 C33 C34 C36 C39-C51 C53 C55-C66 C71 C73 C87 C89 C107 C108 C112-C116 FB1 R12 R19 R20 R23 R25 R34-R44 R63-R65 R68 R70 R80 R95 R99 R100 R105 R107 R109-R111 R122 R133 R135 R152-R158 R176 R183 R188 R189 R191 = LoraWAN_Gateway_Mainboard
C10 C11 C14 C15 C26 C31 C35 C54 C69 C76 C81 C84 C86 C151 C158-C163 J12 J14 J15 J17 JP1 R1-R11 R13-R15 R18 R21 R27-R30 R33 R48 R49 R54 R55 R60 R61 R66 R67 R69 R71-R73 R77 R79 R81-R86 R88-R91 R96 R101 R103 R106 R112-R119 R129 R139 R143 R149 R160 R164 R180 R181 R186 R187 R192 R210 U175 = ESP32 Display 5.0 inch V1.2
C23 C24 C27 C32 C85 C103 C104 C149 C150 C152 C153 R53 R87 = ESP32-P4 Display 7.0 inch V0.2
D1 = KT-0603RYG
D2 D003 D4 D007 D008 D10 D11 D14 FB2 FB3 FB10 FB11 FB16-FB20 FPC2 J1-J6 J9-J11 J13 J16 K3 K4 L4 P1-P81 Q1 Q2 Q4 Q6-Q11 R16 R31 R32 R74 R159 U2 = CrowPanel_Advance_HMI
FPC3 = FPC
IC1 = ESP32-C6-MINI-1-N4; DESCRIPTION: Multiprotocol Modules ESP32-C6 Module, supports Wi-Fi 6 in 2.4 GHz band, Bluetooth 5, Zigbee 3.0 and Thread - -40 to 105C; HEIGHT: mm; MANUFACTURER_NAME: Espressif Systems; MANUFACTURER_PART_NUMBER: ESP32-C6-MINI-1-N4; MOUSER_PART_NUMBER: 356-ESP32C6MINI-1-N4; MOUSER_PRICE-STOCK: https://www.mouser.co.uk/ProductDetail/Espressif-Systems/ESP32-C6-MINI-1-N4?qs=Jm2GQyTW%2FbjiJX9bVadqSw%3D%3D
IC2 IC3 IC7 IC8 = ME6211C18M(22M)5G-N; DESCRIPTION: High Speed LDO Regulators, High PSRR, Low noise; HEIGHT: 1.45mm; MANUFACTURER_NAME: Micron; MANUFACTURER_PART_NUMBER: ME6211C18M5G-N
IC4 = W25Q128JVSIQ; ARROW_PART_NUMBER: W25Q128JVSIQ; ARROW_PRICE-STOCK: https://www.arrow.com/en/products/w25q128jvsiq/winbond-electronics?utm_currency=USD&region=nac; DESCRIPTION: 128M-bit Serial Flash Memory with uniform 4KB sectors and Dual/Quad SPI; HEIGHT: 2.16mm; MANUFACTURER_NAME: Winbond; MANUFACTURER_PART_NUMBER: W25Q128JVSIQ; MOUSER_PART_NUMBER: 454-W25Q128JVSIQ; MOUSER_PRICE-STOCK: https://www.mouser.co.uk/ProductDetail/Winbond/W25Q128JVSIQ?qs=qSfuJ%252Bfl%2Fd6tLXvPR4fl9w%3D%3D
J7 = EAGLElib
J8 = Mini PC Case
L1 L5 L6 = SparkFun-Coils; PROD_ID: NDUC-14880
Q3 Q5 = ESP32-P4 Display 7.0 inch V0.2(1)
S1 U5 = Mylib1
SW1 = cooper
U1 = sale
U3 U13 = STC_MCUSTC8G1K08A
U6 = CrowPanel_Advice_HMI 4.3
U7 = ESP32-P4NRW32; AVAILABILITY: Not in stock; CHECK_PRICES: https://www.snapeda.com/parts/ESP32-P4NRW32/Espressif+Systems/view-part/?ref=eda; DESCRIPTION: 高性能 MCU，带有一个 RISC-V 32 位双核微处理器; MF: Espressif Systems; MP: ESP32-P4NRW32; PACKAGE: None; PRICE: None; SNAPEDA_LINK: https://www.snapeda.com/parts/ESP32-P4NRW32/Espressif+Systems/view-part/?ref=snap
U8 = UMH3NTN; AVAILABILITY: In Stock; CHECK_PRICES: https://www.snapeda.com/parts/UMH3NTN/Rohm/view-part/?ref=eda; DESCRIPTION: Pre-Biased Bipolar Transistor (BJT) 2 NPN - Pre-Biased (Dual) 50V 100mA 250MHz 150mW Surface Mount UMT6; MF: Rohm; MP: UMH3NTN; PACKAGE: SOT-363 Rohm; PRICE: None; PURCHASE-URL: https://www.snapeda.com/api/url_track_click_mouser/?unipart_id=355768&manufacturer=Rohm&part_name=UMH3NTN&search_term=umh3n; SNAPEDA_LINK: https://www.snapeda.com/parts/UMH3NTN/Rohm/view-part/?ref=snap
U9 U10 = TLV62569DBVR; AVAILABILITY: In Stock; CHECK_PRICES: https://www.snapeda.com/parts/TLV62569DBVR/Texas+Instruments/view-part/?ref=eda; DESCRIPTION: 2.5V-5.5V input, 2-A high efficiency step-down buck converter in SOT23 and SOT563 package; MF: Texas Instruments; MP: TLV62569DBVR; PACKAGE: SOT-23-5 Texas Instruments; PRICE: None; SNAPEDA_LINK: https://www.snapeda.com/parts/TLV62569DBVR/Texas+Instruments/view-part/?ref=snap
U14 = MY_LIB
U$113 = A7670X_4G_PCIE
Y2 = X322540MPB4SI_40MHZ; DESCRIPTION: SMD Crystal Resonators 40MHz +/-10ppm SMD-3225_4P RoHS; HEIGHT: 0.8mm; MANUFACTURER_NAME: Yangxing Tech; MANUFACTURER_PART_NUMBER: X322540MPB4SI
Y3 = 24MHZ_1631-24003-BTKEYA
Y4 = nRF52832_MCU

## Nets
3V3$: C2.2 U1.10
13: R189.1 U14.3
14: R188.1 U14.4
+5V_IN: D2.+ D4.+ J10.3 P63.P$1 R46.1 R51.1
+VBUS1: D10.+ D11.+ J1.A4 J1.A9 J1.B4 J1.B9 P1.P$1
+VBUS2: D007.+ D008.+ J16.A4 J16.A9 J16.B4 J16.B9
ADC_VBAT: C158.2 R164.2 R186.1 U14.13
AGND: C102.2 C103.2 C104.2 C105.1 C106.1 FB19.2 J4.P$3 J4.P$4 R143.2 U13.7 U13.9
AGND1: C25.1 R176.2 R183.2 U175.5_1 U175.5_2
AGND3: C22.2 C23.2 C24.2 C67.1 C68.1 FB20.2 J6.P$3 J6.P$4 U3.7 U3.9
AUDIO_CTRL: Q10.3 R117.1 R139.1
AUDIO_OUT_SD_P10: Q10.1 R71.1 U14.19
AUDIO_VDD1: C102.1 C103.1 C104.1 FB17.1 U13.6
AUDIO_VDD2: C22.1 C23.1 C24.1 FB18.1 U3.6
AUDIO_VDD_3V3: C152.2 C153.2 FB1.1 FB16.2 IC7.5
AVDD_2V8: C82.2 C83.2 FPC3.1 FPC3.2 IC3.5
C6_EN_IO20: C15.1 IC1.8 R77.1 R95.2
C6_IO8: IC1.22 R87.2
C6_IO9_BOOT: IC1.23 P36.P$1
C6_RXD0: IC1.30 P21.P$1
C6_TXD0: IC1.31 P25.P$1
C6_VDD_3V3: C11.1 C14.2 IC1.3 P37.P$1 R76.1 R77.2 R81.1 R82.1 R83.1 R84.1 R85.1 R86.1 R87.1
CSI_CLK_N: FPC3.19 R156.2
CSI_CLK_P: FPC3.18 R157.2
CSI_D0_N: FPC3.16 R152.2
CSI_D0_P: FPC3.15 R153.2
CSI_D1_N: FPC3.22 R154.2
CSI_D1_P: FPC3.21 R155.2
CSI_RESET: FPC3.8 Q4.2 R57.2
CSI_RESET_P13: Q4.3 R58.2 U14.2
CSI_SCL: FPC3.4 Q7.2 R62.2
CSI_SDA: FPC3.5 Q6.2 R56.2
CSID0_P: R153.1 U7.43
DA1: J5.8 R15.1
DA2: J5.1 R30.1
DOVDD_1V8: C77.2 C78.2 C84.2 C85.2 FPC3.9 IC2.5 Q4.1 Q6.1 Q7.1 R56.1 R57.1 R62.1 R67.2 Y3.4
DOWNLOAD_BOOT: R60.1 R69.2 R106.2
DTR: R5.2 U1.4 U8.4
EN_DCDC: R13.2 U7.79
ESP32_LDO1: C58.1 R105.2 U7.71
ESP32_LDO2: C57.1 R40.2 U7.72
ESP32_LDO3: C59.1 R80.2 U7.73
ESP32_LDO4: C66.1 R109.2 U7.74
FB_DCDC: C31.1 R14.2 R21.1 R103.1 U10.5
FLASH_CK: IC4.6 U7.32
FLASH_CS: IC4.1 R65.1 U7.27
FLASH_D: IC4.5 U7.33
FLASH_HOLD: IC4.7 U7.31
FLASH_Q: IC4.2 U7.28
FLASH_WP: IC4.3 U7.29
GND [GND]: C1.1 C2.1 C3.1 C4.1 C5.2 C6.1 C7.2 C8.1 C9.2 C10.1 C11.2 C12.2 C13.2 C14.1 C15.2 C17.1 C18.2 C19.2 C27.1 C28.2 C29.2 C30.2 C32.1 C33.2 C34.1 C35.1 C36.2 C39.2 C40.2 C41.2 C42.1 C43.2 C44.1 C45.2 C46.2 C47.1 C48.1 C49.1 C50.2 C51.2 C53.1 C54.1 C55.2 C56.1 C57.2 C58.2 C59.2 C60.2 C61.2 C62.2 C63.2 C64.2 C65.2 C66.2 C69.1 C70.2 C71.1 C73.2 C74.1 C75.1 C76.1 C77.1 C78.1 C79.1 C80.1 C81.1 C82.1 C83.1 C84.1 C85.1 C86.1 C87.2 C88.2 C89.1 C107.1 C108.2 C112.1 C113.2 C114.1 C115.2 C116.1 C136.1 C144.1 C149.1 C150.1 C151.1 C152.1 C153.1 C155.1 C156.1 C157.1 C158.1 C159.1 C160.1 C161.1 C162.1 C163.1 D14.- FB19.1 FB20.1 FPC2.4 FPC2.7 FPC2.8 FPC3.3 FPC3.6 FPC3.10 FPC3.12 FPC3.17 FPC3.20 FPC3.25 FPC3.26 IC1.1 IC1.2 IC1.11 IC1.14 IC1.36 IC1.37 IC1.38 IC1.39 IC1.40 IC1.41 IC1.42 IC1.43 IC1.44 IC1.45 IC1.46 IC1.47 IC1.48 IC1.49 IC1.50 IC1.51 IC1.52 IC1.53 IC1.54 IC1.55 IC1.56 IC1.57 IC1.58 IC1.59 IC1.60 IC1.61 IC2.2 IC3.2 IC4.4 IC7.2 IC8.2 J1.A1 J1.A12 J1.B1 J1.B12 J1.P$1 J1.P$2 J1.P$3 J1.P$4 J2.4 J2.SS1 J2.SS2 J3.P$2 J3.P$3 J3.P$4 J5.6 J5.G1 J5.G2 J5.G3 J5.G4 J7.11 J7.13 J7.14 J7.15 J7.16 J8.4 J9.6 J9.6-6 J10.4 J10.5 J10.6 J12.P$1 J13.4 J13.SS1 J13.SS2 J14.P$1 J15.P$1 J16.A1 J16.A12 J16.B1 J16.B12 J16.P$1 J16.P$2 J16.P$3 J16.P$4 J17.P$1 JP1.P$5 JP1.P$12 JP1.P$18 JP1.P$19 JP1.P$20 JP1.P$27 JP1.P$28 JP1.P$34 JP1.P$35 JP1.P$36 JP1.P$38 JP1.P$41 JP1.P$42 K3.1 K4.1 P4.P$1 P10.P$1 P12.P$1 P28.P$1 P30.P$1 P31.P$1 P60.P$1 P70.P$1 P71.P$1 P76.P$1 P80.P$1 P81.P$1 R3.1 R4.2 R11.2 R16.1 R18.1 R21.2 R33.2 R73.1 R74.2 R96.1 R101.2 R158.2 R159.1 R160.2 R183.1 R186.2 SW1.1 SW1.6 U1.3 U1.EP U2.2 U5.6 U6.2 U7.105 U9.2 U10.2 U14.10 Y2.2 Y2.4 Y3.2
I2C1_SCL: P18.P$1 Q9.2 R64.2 R97.2 U7.88
I2C1_SCL_3V3: J11.2 J11.2-2 J13.1 P62.P$1 Q9.3 R93.2 R188.2
I2C1_SDA: P19.P$1 Q8.2 R63.2 R98.2 U7.87
I2C1_SDA_3V3: J11.3 J11.3-3 J13.2 P61.P$1 Q8.3 R94.2 R189.2
I2C2_SCL: Q7.3 R59.2 U7.65
I2C2_SDA: Q6.3 R22.2 U7.64
I2S_LRCK: R114.1 R149.1 U7.23
I2S_SCLK: R113.1 R129.1 U7.24
I2S_SDOUT: R112.1 R115.1 U7.25
I2SOUT_LRCK1: R149.2 U13.2
I2SOUT_LRCK2: P35.P$1 R114.2 U3.2
I2SOUT_SCLK1: R129.2 U13.3
I2SOUT_SCLK2: P34.P$1 R113.2 U3.3
I2SOUT_SD1: R112.2 U13.4
I2SOUT_SD2: P33.P$1 R115.2 U3.4
IO29_W: J7.6 J11.5 J11.5-5 P23.P$1 U7.58
IO30_W_BUSY: J7.8 J11.6 J11.6-6 P22.P$1 U7.60
LCD_3V3: C160.2 C161.2 C162.2 C163.2 FPC2.5 JP1.P$37 P40.P$1 P72.P$1 R92.1 R191.2
LCD_B3_IO8: JP1.P$17 P52.P$1 U7.8
LCD_B4_IO7: JP1.P$16 P53.P$1 U7.7
LCD_B5_IO6: JP1.P$15 P56.P$1 U7.6
LCD_B6_IO5: JP1.P$14 P57.P$1 U7.5
LCD_B7_IO4: JP1.P$13 P65.P$1 U7.4
LCD_BK_EN_P11: R72.1 U14.20
LCD_BK_POWER_P37: R79.1 R180.1 U14.18
LCD_BK_VDD: C13.1 C17.2 L5.1 Q11.3 R184.2 U6.6
LCD_CLK_IO3: JP1.P$11 P66.P$1 R68.2
LCD_DE_IO2: JP1.P$7 P69.P$1 U7.2
LCD_G2_IO14: JP1.P$26 P46.P$1 U7.15
LCD_G3_IO13: JP1.P$25 P47.P$1 U7.14
LCD_G4_IO12: JP1.P$24 P48.P$1 U7.13
LCD_G5_IO11: JP1.P$23 P49.P$1 U7.12
LCD_G6_IO10: JP1.P$22 P50.P$1 U7.11
LCD_G7_IO9: JP1.P$21 P51.P$1 U7.10
LCD_HSYNC_IO40: JP1.P$9 P67.P$1 U7.81
LCD_LED+: C18.1 C19.1 D003.- JP1.P$39 P39.P$1 U6.5
LCD_LED-: JP1.P$40 P38.P$1 R159.2 U6.3
LCD_R3_IO19: JP1.P$33 P41.P$1 U7.20
LCD_R4_IO18: JP1.P$32 P42.P$1 U7.19
LCD_R5_IO17: JP1.P$31 P43.P$1 U7.18
LCD_R6_IO16: JP1.P$30 P44.P$1 U7.17
LCD_R7_IO15: JP1.P$29 P45.P$1 U7.16
LCD_VSYNC_IO41: JP1.P$8 P68.P$1 U7.82
MIC1_1: R133.2 U175.1
MIC1_2: R34.1 R176.1 U175.2
MIC1_3: R135.1 U175.3
MIC1_VDD_3V3: C25.2 FB1.2 R34.2 U175.4
MIC_MCLK1_IO24: P27.P$1 R135.2 U7.52
MIC_SD1_IO25: P29.P$1 R133.1 U7.53
N$1: R1.1 U9.1
N$2: L1.1 U9.3
N$3: R55.2 U7.66
N$4: FB10.1 U13.8
N$5: R6.1 U1.1
N$6: R7.1 U1.2
N$7: R5.1 U8.2
N$8: R9.1 U8.5
N$9: J1.B5 R3.2
N$10: R8.2 U1.9
N$11: R10.2 U1.8
N$12: R16.2 U2.6
N$13: C26.1 R2.2 R11.1 U9.5
N$14: L6.1 U10.3
N$15: C151.2 IC7.3 R181.1
N$16: R13.1 R210.2 U10.1
N$17: FPC2.1 R64.1
N$18: FPC2.2 R63.1
N$19: D1.3 R31.1 R121.1
N$20: D1.4 R32.1 R120.1
N$21: D14.+ R26.1
N$22: C159.2 R187.2 R192.2 U14.7
N$23: J9.1 J9.1-1 R49.1
N$24: J11.1 J11.1-1 R48.1
N$25: C30.1 R35.1 U7.1 Y4.2
N$26: Q5.4 R78.1 SW1.2 SW1.5
N$27: J1.A5 R4.1
N$28: Q11.1 R79.2
N$29: C28.1 R24.1 R210.1 U10.4
N$30: C29.1 R35.2 U7.104 Y4.1
N$31: JP1.P$10 R191.1
N$32: R68.1 U7.3
N$33: R72.2 R160.1 U6.4
N$34: R99.2 U7.49
N$35: R100.2 U7.50
N$36: R95.1 U7.22
N$41: R103.2 U7.78
N$45: FB2.1 U3.8
N$46: FB11.1 U13.5
N$47: FB3.1 U3.5
N$48: R117.2 U3.1
N$49: R118.2 U14.12
N$50: R119.2 U14.11
N$51: R139.2 R143.1 U13.1
N$55: C155.2 IC8.3 R116.1
N$68: R158.1 U7.48
N$69: R157.1 U7.44
N$70: R156.1 U7.45
N$71: R155.1 U7.47
N$72: R154.1 U7.46
N$73: R152.1 U7.42
N$75: J16.B5 R96.2
N$76: J16.A5 R101.1
N$83: C76.2 IC2.3 R61.1
N$84: C81.2 IC3.3 R66.1
N$85: C86.2 R67.1 Y3.1
N$121: D003.+ L5.2 U6.1
P4_IO36: R60.2 U7.68
P4_IO39: R90.2 U7.80
P4_IO43: R88.2 U7.84
P4_IO44: R89.2 U7.86
P4_RST_EN: C35.2 K4.2 R54.2 R192.1 U7.103 U8.6
P4_RXD1_IO48: J2.1 P79.P$1 U5.5
P4_RXD2_IO32: J7.12 P59.P$1 R48.2 U7.63
P4_TXD1_IO47: J2.2 P78.P$1 U5.7
P4_TXD2_IO31: J7.10 P58.P$1 R49.2 U7.61
P4_VBAT: C9.1 C42.2 R20.1 U7.102
POWER_CHRG: R50.1 R120.2 U2.1 U14.14
POWER_DONE: R47.1 R121.2 U2.5 U14.15
POWER_G_LED: R31.2 U14.17
POWER_R_LED: R32.2 U14.16
RTS: R9.2 U1.6 U8.1
RXD0: R10.1 U7.70
RXD1_MOSI_IO48: J7.9 U5.3 U7.90
RXD3: Q2.2 R45.2 U7.57
SD1_CMD_IO44: J5.3 P8.P$1 R28.1 R89.1
SD1_D0_IO39: J5.7 P6.P$1 R27.1 R90.1
SD1_SCK_IO43: J5.5 P7.P$1 R88.1
SD2_CLK: IC1.25 R82.2 U7.97
SD2_CMD: IC1.24 R81.2 U7.98
SD2_D0: IC1.26 R83.2 U7.95
SD2_D1: IC1.27 R84.2 U7.94
SD2_D2: IC1.28 R85.2 U7.93
SD2_D3: IC1.29 R86.2 U7.92
SDCS: J5.2 R29.1 R33.1
SEL0: R53.2 R73.2 S1.2 U5.4 U5.8
SPI2_MISO_IO47: J9.3 J9.3-3 P15.P$1 U5.10
SPI2_MOSI_IO48: J9.4 J9.4-4 P14.P$1 U5.2
SPI2_SCK_IO26: J7.5 J9.2 J9.2-2 P16.P$1 U7.55
SPI_BOOT: C54.2 K3.2 R55.1 R91.2 U8.3
STC8_RXD: J8.2 R119.1
STC8_TXD: J8.1 R118.1
STC8_VDD_3V3: C69.2 C156.2 C157.2 D1.1 D1.2 IC8.5 J8.3 R58.1 R187.1 U14.8 U14.9
SW_SPI_UART_P17: R53.1 U14.6
TP_INT_IO42: FPC2.3 P20.P$1 R75.2 U7.83
TP_RST: FPC2.6 P73.P$1 R74.1 R111.1 R122.1
TP_RST_IO36: R69.1 R111.2
TP_RST_P12: R122.2 U14.1
TXD0: R8.1 U7.69
TXD1_MISO_IO47: J7.7 U5.9 U7.89
TXD3: Q1.2 R52.2 U7.56
UART_IN_RXD3: J10.2 P64.P$1 Q2.3 R46.2
UART_IN_TXD3: J10.1 P74.P$1 Q1.3 R51.2
USB1_D+: J1.A6 J1.B6 P2.P$1 R6.2
USB1_D-: J1.A7 J1.B7 P3.P$1 R7.2
USB2_D+: J16.A6 J16.B6 R100.1
USB2_D-: J16.A7 J16.B7 R99.1
VBAT: C4.2 J3.P$1 P9.P$1 Q3.5 Q3.6 Q3.7 Q3.8 Q3.9 R17.1 R164.1 U2.3
VCC5V: C136.2 C144.2 D2.- D007.- D10.- IC8.1 P11.P$1 Q3.1 Q3.2 Q3.3 Q5.1 Q5.2 Q5.3 R78.2 R116.2
VCC5V_IN: C3.2 D4.- D008.- D11.- Q3.4 R17.2 R18.2 R47.2 R50.2 U2.4
VCCA: C43.1 C47.2 R23.1 U7.51
VDD5V: C12.1 C149.2 C150.2 FB17.2 FB18.2 IC7.1 J7.2 J7.4 L4.2 P5.P$1 Q5.5 Q5.6 Q5.7 Q5.8 Q5.9 Q11.2 R1.2 R24.2 R26.2 R180.2 R181.2 R184.1 U9.4
VDD5V_W: C88.1 J9.7 J9.7-7 L4.1
VDD_1V2: C31.2 C32.2 L6.2 P24.P$1 R14.1 R42.2 R43.2 R44.2
VDD_3V3: C1.2 C10.2 C26.2 C27.2 C53.2 C70.1 C74.2 C75.2 C79.2 C80.2 C89.2 FB16.1 IC2.1 IC3.1 J2.3 J5.4 J7.1 J7.3 J9.5 J9.5-5 J13.3 L1.2 P13.P$1 P17.P$1 P75.P$1 P77.P$1 Q1.1 Q2.1 Q10.2 R2.1 R12.2 R15.2 R19.2 R20.2 R23.2 R25.2 R27.2 R28.2 R29.2 R30.2 R36.2 R37.2 R38.2 R39.2 R41.2 R45.1 R52.1 R54.1 R61.2 R66.2 R70.2 R71.2 R76.2 R91.1 R92.2 R93.1 R94.1 R106.1 R107.2 R110.2 S1.1 U1.7 U5.1
VDD_FLASH: C39.1 C40.1 C51.1 IC4.8 R65.2 R105.1 R107.1
VDD_HP_0: C108.1 C112.2 R42.1 U7.26
VDD_HP_2: C113.1 C114.2 R43.1 U7.76
VDD_HP_3: C115.1 C116.2 R44.1 U7.91
VDD_MIPI_DPHY: C62.1 C63.1 C64.1 R80.1 U7.41
VDDA: C7.1 C8.2 R19.1 U7.101
VDDPST: C36.1 C55.1 R40.1 R110.1 U7.59 U7.67
VDDPST_1: C73.1 C107.2 R36.1 U7.9
VDDPST_2: C41.1 C44.2 R37.1 U7.21
VDDPST_3: C45.1 C49.2 R38.1 U7.30
VDDPST_4: C50.1 C56.2 R39.1 U7.62
VDDPST_5: C60.1 C65.1 Q8.1 Q9.1 R22.1 R25.1 R59.1 R75.1 R97.1 R98.1 R109.1 U7.85
VDDPST_6: C61.1 C71.2 R41.1 U7.96
VDDPST_DCDC: C5.1 C6.2 R12.1 U7.77
VDDPST_LDO: C46.1 C48.2 R70.1 U7.75
VOLN: C106.2 FB11.2 J4.P$2 P55.P$1
VOLP: C105.2 FB10.2 J4.P$1 P54.P$1
VORN: C68.2 FB3.2 J6.P$2 P32.P$1
VORP: C67.2 FB2.2 J6.P$1 P26.P$1
XTAL_N: C34.2 U7.99 Y2.3
XTAL_P: C33.1 U7.100 Y2.1
XVCLK: C87.1 FPC3.11 Y3.3

## Tracks (layer width: path | path; a pad name or v marks a point on that pad's centre or on a via)
3V3$
  Top 0.152: U1.10 109.13,47.8 C2.2
13
  Top 0.152: U14.3 108.19,36.95 R189.1
14
  Top 0.152: R188.1 107.53,37.23 U14.4
+5V_IN  (via drill 0.3)
  Top 0.152: R51.1 118.67,27.84 118.36,27.53 118.36,23.62 118.71,23.27 120.34,23.27
  Top 0.254: v121.15,23.27 120.34,23.27 R46.1
  Top 1.016: J10.3 128,15.75 v129.03,16.78 129.76,17.5 129.76,21.21 128.71,22.25 124.3,22.25 v123.27,23.27 | v121.63,38.27 121.62,38.28 120.72,38.28 | 120.72,38.28 D4.+ | D2.+ v120.66,39.14 120.66,38.35 120.72,38.28
  Bottom 0.152: v121.63,38.27 120.76,39.14 v120.66,39.14
  Bottom 0.254: v123.27,23.27 v121.15,23.27
  Bottom 1.016: v123.27,23.27 123.27,36.63 v121.63,38.27 | P63.P$1 126.62,16.78 v129.03,16.78
  pour Bottom: 119.94,38.68 119.94,39.27 120.52,39.85 121.62,39.85 121.92,39.55 122.43,39.04 122.43,38.15 122.43,37.62 122.07,37.26 120.5,37.26 120.04,37.72 119.94,37.82
  pour Top: 119.96,37.97 119.96,39.6 120.19,39.83 120.22,39.85 121.64,39.85 121.95,39.55 121.95,38.63 121.95,38.15 121.64,37.85 120.09,37.85
+VBUS1  (via drill 0.3)
  Top 0.152: v120.66,46.12 121.69,46.12 v121.81,46 121.36,46.45 v121.36,46.68 | v120.53,50.85 121.66,50.85 v121.72,50.9
  Top 0.305: J1.A4 v121.81,46 120.78,46 v120.66,46.12 | J1.B4 123.87,50.9 v121.72,50.9
  Top 0.813: D10.+ 120.92,44.46 122.79,42.59 122.79,37.78 121.85,36.83 D11.+
  Top 1.016: D10.+ v120.66,46.12
  Bottom 0.152: v120.53,50.85 120.92,50.46 v121.2,50.46 121.36,50.3 v121.36,46.68
  Bottom 0.406: v120.66,46.12 120.64,46.13 P1.P$1
  pour Top: 123.38,46.43 122.98,46.43 122.73,46.68 122.72,46.68 122.39,47 120.31,47 119.23,45.92 119.23,44.39 119.8,43.82 121.05,43.82 121.77,44.55 121.77,44.85 122.8,45.88 123.34,45.88 123.5,46.04 123.5,46.3 123.38,46.42
  pour Bottom: 120.14,45.72 120.14,51.05 120.4,51.31 121.92,51.31 122.17,51.05 122.17,45.72 121.92,45.47 120.4,45.47
  pour Top: 120.4,51.31 122.68,51.31 122.76,51.23 123.19,51.23 123.32,51.1 123.32,50.88 123.11,50.67 122.73,50.67 122.15,50.09 120.35,50.09 120.14,50.29 120.14,51.05
+VBUS2  (via drill 0.3)
  Top 0.152: v121.73,33.8 120.94,33.8 v120.92,33.78 | v121.41,29.59 121.28,29.46 v120.78,29.46
  Top 0.305: J16.A4 v121.74,29 | J16.B4 v121.73,33.8
  Top 1.016: D007.+ 120.12,42.41 119.02,41.3 119.02,35.68 119.34,35.35 120.18,35.35 D008.+
  Bottom 0.152: v120.93,34.6 120.92,34.59 v120.92,33.78 120.78,33.64 v120.78,29.46 | v121.74,29 121.74,29.27 v121.41,29.59
  pour Top: 118.87,35.81 121.16,35.81 122.76,34.21 123.29,34.21 123.39,34.11 123.39,33.81 123.27,33.68 122.78,33.68 122.38,33.27 120.12,33.27 118.62,34.77 118.62,35.56
  pour Bottom: 120.4,29.21 120.4,34.8 120.65,35.05 121.92,35.05 122.17,34.8 122.17,28.7 121.92,28.45 120.65,28.45 120.4,28.7
  pour Top: 120.4,29.34 120.4,29.72 120.65,29.97 122.3,29.97 122.81,29.46 122.86,29.41 123.27,29.41 123.39,29.29 123.39,29.26 123.39,29.01 123.29,28.91 123.27,28.88 123.11,28.88 122.91,28.88 122.81,28.78 122.58,28.55 121.72,28.55 121.31,28.55 120.9,28.96 120.78,29.08 120.65,29.08 120.52,29.08 120.4,29.21
ADC_VBAT
  Top 0.254: U14.13 105,30.14 C158.2
  Top 0.305: C158.2 105.81,26.75 105.91,26.65 R186.1 R164.2
AGND  (via drill 0.3)
  Top 0.152: U13.7 v23.76,23.71 | v22.75,22.93 v23.76,22.93 v23.77,22.94 C105.1 C106.1 | C104.2 16.96,29.55 v16.96,30.03 | 18.28,35.46 v18.24,35.42 v17.08,34.26 | J4.P$4 v29.35,8.81 v29.34,8.8 | J4.P$3 37.85,11.42 v37.87,11.44 | v35.64,11.48 32.25,11.48 v32.2,11.53 | v30.54,13.21 v29.08,14.66 | v27.16,16.59 25.69,18.06 v25.69,19.14 | v25.91,24 25.91,26.66 v25.79,26.77 | v24.36,27.19 22.1,27.19 v22.04,27.13 | v22.07,28.62 22.13,28.68 v24.29,28.68 | v19.8,31.8 19.8,33.93 v20.23,34.36 | v16.93,27.73 16.93,25.76 v16.91,25.75 | v16.91,23.63 18.43,22.11 v18.43,21.93
  Top 0.406: R143.2 25.31,34.24 25.71,33.84 v25.71,29.27 25.71,28.51 25.1,27.89 U13.9
  Top 0.508: U13.7 23.76,27.26 U13.9 | C104.2 C103.2 17.8,25.31 C102.2 v18.04,23.57 | v18.04,23.57 | v19.47,22.87 FB19.2 | v31.14,11.43 J4.P$4 | v35.85,8.81 J4.P$3